# Altium PCB ESP32 with USBC PCB V1I1.PcbDoc (part 3 of 3)
Units mil, origin at the board's own origin, x right, y up, seen from the top; angles counter-clockwise.
Board outline 2713 x 1000 mil, 4 copper layers (L1, L2, L3, L4), stack 61.583 mil thick; 64 components, 73 nets, 299 pads, 159 vias.
Unrouted connection lines stored in the file: 1.
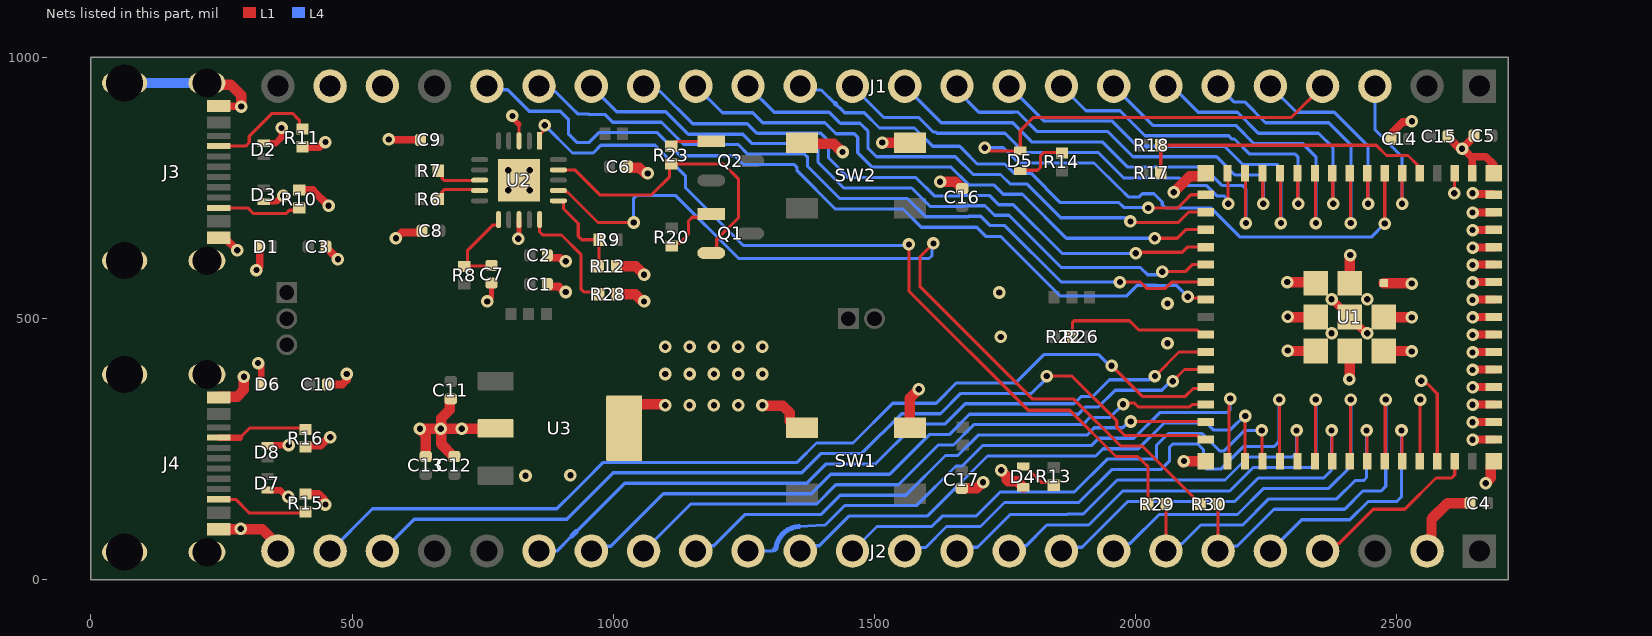
[diagram p4: the nets of this part, all layers, seen from the top]

## Via types
v1: diameter 24, hole 12, L1 to L4, tented both sides, 159 vias

## Nets (pads, with @x,y where several pads share a name; then routed paths per layer and width w, separated by ;. In a path a pad name is that pad's centre, name@x,y a point inside that pad or via, vN(x,y) a via of type N, cw(c..) or ccw(c..) an arc to the next point about the centre after c; other vN are vias at no path point) (continued)
ESP_USB_P: R22.2 R26.2 U1.24 | length 295.5
  L1 w6.03: R26.2@1878.99,465 1878.99,492.47 1882.52,496 1988.38,496 2006.13,478.25 2118.18,478.25 2121.72,474.72 2121.72,474.39 2126.57,469.54 U1.24@2134.45,469.54
FTDI_RESET: C7.2 R8.2 U2.11 | length 175.1
  L1 w6: C7.2@767,601.93 766.04,600.97 720.64,600.97 715.96,600.97 R8.2@715,600.01 720.64,605.64 720.64,630.01 762.63,672 770.2,679.57 779.99,679.57 780.22,679.79 U2.11@780.22,689.59
FTDI_USB_N: R6.2 U2.9 | length 78.5
  L1 w6.03: R6.2@665.01,729 672.62,736.61 672.62,743.46 676.16,746.99 729.79,746.99 730.79,745.99 U2.9@731.59,745.99
FTDI_USB_P: R7.2 U2.8 | length 91.4
  L1 w6.03: R7.2@665.01,783 672.62,775.39 672.62,767.99 676.16,764.46 743.63,764.46 U2.8@744.17,765
GND: C1.1 C2.1 C3.1 C4.1 C5.1 C6.1 C7.1 C8.1 C9.1 C10.1 C11.1 C12.1 C13.1 C14.1 C15.1 C16.1 C17.1 D1.1 D2.1 D3.1 D4.2 D6.1 D7.1 D8.1 J1.22 J1.23 J2.2 J2.24 J3.A1B12 J3.B1A12 J3.S1 J3.S2 J3.S3 J3.S4 J4.A1B12 J4.B1A12 J4.S1 J4.S2 J4.S3 J4.S4 R10.1 R11.1 R12.1 R15.1 R16.1 R28.2 SW1.3 SW1.4 SW2.3 SW2.4 U1.1 U1.2 U1.42 U1.43 U1.46 U1.47 U1.48 U1.49 U1.50 U1.51 U1.52 U1.53 U1.54 U1.55 U1.56 U1.57 U1.58 U1.59 U1.60 U1.61 U1.62 U1.63 U1.64 U1.65 U1.66 U1.67 U1.68 U1.69 U1.70 U1.71 U1.72 U1.73 U2.3 U2.13 U2.21 U3.2 U3.4 | length 4547.6
  L1 w6: U2.3@819.35,851.94 819.35,871.86 ; U1.42@2544.45,229.71 2544.45,344.45 v1(2545,345) ; v1(2547,381) 2550.79,381 2556.94,374.85 2559.03,374.85 2577.36,356.51 U1.43@2577.36,227.41 ; v1(2610,740) 2610.41,740.41 2610.41,778.18 U1.2@2610.83,778.59
  L1 w10.01: v1(759,533) 767,541 C7.1@767,568.07 ; v1(807,888) 807,884.21 819.35,871.86 ; v1@819.59,653 U2.13@819.59,689.59
  L1 w12: v1(320,415) 326.2,408.8 D6.1@326.2,374 ; D3.1@331,724.2 355.43,724.2 366.22,735 v1(368,735) ; D2.1@331,835.8 353.8,835.8 364.79,846.79 364.79,864.79 v1(365,865) ; D7.1@337,172 337.69,171.31 362.44,171.31 374.75,159 v1(378,159) ; D8.1@338.69,255.91 340.18,257.4 378.4,257.4 v1(379,258)
  L1 w15: J3.B1A12@244.84,655.02 255.67,655.02 v1(280,630.68) ; J3.A1B12@244.84,906.98 245.33,906.49 v1@287.51,906.49 ; v1(317,593) 323.2,599.2 D1.1@323.2,638 ; R10.1@399,746.01 424.99,746.01 v1(455,716) ; R11.1@405.22,828 436.56,828 446.56,838 v1(449,838) ; R15.1@411,164.01 411.45,164.46 435.71,164.46 447.28,152.9 447.28,145.72 v1(449,144) ; R16.1@411,253.99 414.13,257.12 439.69,257.12 455.56,273 v1(458,273) ; C3.1@449.93,638 449.93,636.82 v1(473,613.75) ; C10.1@452.93,374 481.21,374 490,382.79 v1(490,394) ; v1(570,843) 570.5,842.5 629.57,842.5 C9.1@630.07,843 ; v1(584,654) 595,665 631.07,665 C8.1@634.07,668 ; C1.1@873.93,566 873.93,564.82 877.06,561.69 895.88,561.69 906.56,551 v1(909,551) ; C2.1@873.93,621 873.93,619.82 877.06,616.69 897.88,616.69 904.56,610 v1@907,610 ; v1(2375,537.24) 2375.8,537.24 U1.61@2410.04,503 2439.08,473.96 2441.73,473.96 v1(2443.45,472.24) ; C14.1@2489.07,844 2492.2,847.13 2492.2,857.16 2511.32,876.28 2527.28,876.28 v1(2529,878) ; C15.1@2597.93,849 2601.06,845.87 2601.06,844.69 2619.03,826.72 2623.28,826.72 v1(2625,825) ; U1.1@2644.29,778.59 2644.29,808.14 2642.44,810 ; v1@2645,268.75 U1.46@2685.63,268.75 ; v1@2645,302.21 U1.47@2685.63,302.21 ; v1@2645,335.73 U1.48@2687.44,335.73 ; v1@2645,369.14 U1.49@2685.63,369.14 ; v1@2645,402.61 U1.50@2685.63,402.61 ; v1@2645,436.07 U1.51@2685.63,436.07 ; v1@2645,469.54 U1.52@2685.63,469.54 ; v1@2645,503 U1.53@2685.63,503 ; v1@2645,536.52 U1.54@2687.44,536.52 ; v1@2645,569.93 U1.55@2685.63,569.93 ; v1@2645,603.39 U1.56@2685.63,603.39 ; v1(2645,636.11) 2645.37,636.48 2685.26,636.48 U1.57@2685.63,636.86 ; v1(2645,669.57) 2645.37,669.95 2685.26,669.95 U1.58@2685.63,670.32 ; v1(2645,703.04) 2645.37,703.41 2685.26,703.41 U1.59@2685.63,703.79 ; v1(2645,740) 2646.37,738.63 2684.26,738.63 U1.60@2685.63,737.25 ; C5.1@2648.07,850 2648.07,848.82 2625,825.75 v1(2625,825) ; U1.62@2685.63,778.59 2685,779.22 2685,795 2670,810 2642.44,810 ; v1(2625,825) 2627.44,825 2642.44,810
  L1 w20: J3.S1@222.2,951.08 225.91,947.37 267.63,947.37 287.48,927.52 287.48,906.52 v1(288,906) ; J4.B1A12@244.84,97.02 286.02,97.02 v1(287,98) 287.77,97.23 327.67,97.23 358,66.91 J2.24@358,55 ; J4.A1B12@244.84,348.98 246.65,350.8 279.8,350.8 293,364 v1(293,389) ; C13.1@641,235.93 641,276.92 630,287.92 v1(630,289) v1(670,289) ; C11.1@689,346.07 687.82,346.07 687.19,345.44 687.19,325.71 670.77,309.28 670.77,289.77 v1(670,289) ; C12.1@696,235.93 694.82,235.93 670.77,259.98 670.77,288.23 v1(670,289) ; U3.2@774.97,290 774.47,289.5 710.5,289.5 v1(710,289) v1(670,289) ; R12.1@1006.01,600 1043,600 v1(1059,584) ; R28.2@1007.01,547 1042.44,547 1056,533.44 v1@1056,533 ; U3.4@1021.03,290 1021.03,309.55 U3.4@1045.48,334 ; C6.1@1026.93,791 1026.93,789.82 1027.56,789.19 1049.81,789.19 v1@1061,778 ; U3.4@1045.48,336 v1@1098,336 ; v1(1285.67,334) 1286.43,333.23 1324.77,333.23 1338.3,319.7 1338.3,303.18 1350.48,290.99 SW1.4@1361.31,290.99 ; SW2.4@1361.31,837 1363.21,835.1 1421.82,835.1 1437.92,819 v1(1439,819) ; v1@1514,838 v1(1515,837) SW2.3@1568,837 ; SW1.3@1568,290.99 1568,348 v1(1585,365) ; v1(1625.7,762) 1654.47,762 1666.19,750.28 1666.19,749.56 1666.82,748.93 C16.1@1668,748.93 ; C17.1@1667,175.07 1667.63,175.7 1695.62,175.7 1706.92,187 v1(1708,187) ; v1(1743,210) 1743,208.92 1753.24,198.68 1753.24,191.48 ; 1755.72,189 1773.24,189 D4.2@1785.24,177 ; v1(2073,742) 2103.84,772.84 2128.7,772.84 U1.63@2134.45,778.59 ; v1@2090,225 v1(2092.41,227.41) U1.64@2134.45,227.41 ; v1(2290,570) U1.71@2326.98,570 ; v1(2291.27,503.77) 2292.36,503.77 2293.12,503 U1.72@2345.08,503 ; v1@2292.04,438.04 U1.73@2345.08,438.04 ; v1@2410.04,385 U1.70@2410.04,438.04 ; U1.69@2410.04,567.96 v1@2410.04,621 ; U1.68@2475,438.04 v1@2528.04,438.04 ; U1.67@2475,503 v1@2528.04,503 ; U1.66@2475,567.96 v1@2528.04,567.96 ; J2.2@2558,55 2566.42,63.42 2566.42,116.42 2597,147 C4.1@2640.07,147 ; v1(2670,185) 2679.88,194.88 2679.88,221.66 U1.65@2685.63,227.41
  L4 w20: J3.S3@64.72,951.08 65.8,950 66.88,951.08 J3.S1@222.2,951.08
  other v1: 832,199 918,200 2645,268 2645,301.46 1099.67,334 1146.17,334 1192.67,334 1239.17,334 2645,334.98 2645,368.39 2409.27,384.23 1099.67,394 1146.17,394 1192.67,394 1239.17,394 1285.67,394 2645,401.86 2645,435.32 2528.8,437.27 2291.27,438.8 1099.67,446 1146.17,446 1192.67,446 1239.17,446 1285.67,446 2061,453 1742,465 2645,468.79 2375,472.24 2528.8,502.23 2645,502.25 2061,529 1059,533 2645,535.77 2443.45,537.24 1739,550 2528.8,567.2 2645,569.18 2645,602.65 909,610 2410.8,621.77 818,653 799,746 840,746 1066,778 799,784 840,784
GPIO0: R17.2 R18.2 U1.4 | length 577.7
  L1 w6: R17.2@2048.01,779 R18.2@2048.01,832 2460.72,832 2480.3,812.42 2521.44,812.42 2541.02,792.84 2541.02,781.46 U1.4@2543.9,778.59
GPIO1: J1.3 U1.5 | length 305.3
  L1 w6: v1(2510,720) 2510.22,720.22 2510.22,778.37 U1.5@2510.43,778.59
  L4 w6: J1.3@2458,945 2458,862 2510,810 v1(2510,720)
GPIO2: D5.2 J1.4 U1.6 | length 1672.8
  L1 w6: v1(1711,827) 1714.79,827 1720.79,821 1778.5,821 D5.2@1779,821.5 1779,860 1804,885 2298,885 J1.4@2358,945 ; v1(2477,682) U1.6@2476.98,775.69
  L4 w6: v1(1711,827) 1747,827 1776,798 1920.43,798 1968.43,750 1969,750 1986,733 2006.82,733 2012.82,739 2035.18,739 2051,723.18 2051,717.86 2056.86,712 2144.03,712 2200.03,656 2451,656 v1(2477,682)
GPIO3: J1.5 U1.7 | length 403.8
  L1 w6: U1.7@2443.5,778.59 2444.25,777.84 2444.25,720.75 v1(2445,720)
  L4 w6: J1.5@2258,945 2308,895 2380,895 2445,830 v1(2445,720)
GPIO4: J1.6 U1.8 | length 546.8
  L1 w6: U1.8@2410.04,778.59 2411.02,777.61 2411.02,683.98 v1(2412,683)
  L4 w6: J1.6@2158,945 2188,915 2208.57,915 2248.57,875 2370,875 2412,833 v1(2412,683)
GPIO5: J1.7 U1.9 | length 533
  L1 w6: v1@2377.32,720.75 U1.9@2377.32,777.84
  L4 w6: J1.7@2058,945 2070,945 2120,895 2195,895 2235,855 2350,855 2378.07,826.93 v1(2378.07,720)
GPIO6: J1.8 U1.10 | length 665.6
  L1 w6: U1.10@2343.48,778 2344.09,777.4 2344.09,683.98 v1(2345.07,683)
  L4 w6: J1.8@1958,945 2033,870 2191.72,870 2226.72,835 2320,835 2345.07,809.93 v1(2345.07,683)
GPIO7: J1.9 U1.11 | length 655.7
  L1 w6: v1@2310.39,720.75 U1.11@2310.39,777.84
  L4 w6: J1.9@1858,945 1905,898 1970,898 2018,850 2178.28,850 2184.28,844 2189.36,844 2218.36,815 2305.28,815 2311.14,809.14 v1(2311.14,720)
GPIO8: J1.10 U1.12 | length 785.8
  L1 w6: U1.12@2276.56,778 2277.16,777.4 2277.16,683.98 v1(2278.14,683)
  L4 w6: J1.10@1758,945 1825,878 1955.28,878 2003.28,830 2170,830 2205,795 2271.07,795 2278.14,787.93 v1(2278.14,683)
GPIO9: J1.11 U1.13 | length 770.4
  L1 w6: v1@2243.46,720.75 U1.13@2243.46,777.84
  L4 w6: J1.11@1658,945 1658,937 1700,895 1765.7,895 1766.21,895.51 1774.49,895.51 1812,858 1947,858 1995,810 2155,810 2190,775 2238.35,775 2244.21,769.14 v1(2244.21,720)
GPIO10: J1.12 U1.14 | length 895.4
  L1 w6: U1.14@2209.63,778 2210.23,777.4 2210.23,683.98 v1(2211.21,683)
  L4 w6: J1.12@1558,945 1628,875 1765,875 1802,838 1937,838 1985,790 2130,790 2165,755 2204.14,755 2211.21,747.93 v1(2211.21,683)
GPIO11: J1.13 U1.15 | length 873.6
  L1 w6: v1@2176.54,720.75 U1.15@2176.54,777.84
  L4 w6: J1.13@1458,945 1518,885 1585,885 1613,857 1617.72,857 1619.72,855 1750,855 1787,818 1928.72,818 1977.72,769 2084.18,769 2098.18,755 2135,755 2155,735 2169.14,735 2175,729.14 2175,722.28 v1(2177.28,720)
GPIO12: J1.14 U1.16 | length 883.4
  L1 w6: v1(2024,712) 2081.18,712 2100,730.82 2100,731.39 2105.86,737.25 U1.16@2134.45,737.25
  L4 w6: J1.14@1358,945 1365.23,937.77 1398.03,937.77 1425.23,911.31 ; 1425.29,911.25 1440.18,896.82 1443.08,894 1447.14,894 1480.72,894 1509.72,865 1576.72,865 1611.72,830 1663.14,830 1669,824.14 1697.14,796 1749.72,796 1767.72,778 1800,778 1856,722 1968.15,722 1977.15,713 2023,713 v1(2024,712)
  L4 w10: 1425.23,911.31 ccw(c1458,945) 1425.29,911.25
GPIO13: J1.15 U1.17 | length 1011.7
  L1 w6: v1(1990,686) 1992,684 2081.47,684 2101.26,703.79 U1.17@2134.45,703.79
  L4 w6: J1.15@1258,945 1308,895 1413.31,895 1417.04,891.39 1429.06,879.74 1434.8,874 1472.43,874 1488,858.43 1488,825.82 1503.82,810 1654.86,810 1688.86,776 1741.43,776 1759.43,758 1791.72,758 1856.72,693 1979.21,693 1986.21,686 v1(1990,686)
GPIO14: J1.16 U1.18 | length 1120.9
  L1 w6: v1(2036.59,654) 2079.75,654 2096.07,670.32 U1.18@2134.45,670.32
  L4 w6: J1.16@1158,945 1209,894 1267,894 1286,875 1405.22,875 1415.03,865.48 1426.52,854 1461,854 1468,847 1468,817.53 1495.53,790 1646.57,790 1680.57,756 1728.28,756 1746.28,738 1783.43,738 1867.43,654 v1(2036.59,654)
GPIO15: J1.17 U1.19 | length 1233.5
  L1 w6: v1(2000,625) 2002,627 2089,627 2098.86,636.86 U1.19@2134.45,636.86
  L4 w6: J1.17@1058,945 1068.33,934.67 1090.33,934.67 1152,873 1256.28,873 1273.65,855.63 1276.02,855 1397.11,855 1401,851.23 1409.07,843.16 1412,840.23 1412,807.82 1449.82,770 1579.51,770 1614.51,735 1663.01,735 1664.01,736 1720,736 1738,718 1766,718 1859,625 v1(2000,625)
GPIO16: J1.18 U1.20 | length 1352.2
  L1 w6: v1(2050.71,590) 2095,590 2108.39,603.39 U1.20@2134.45,603.39
  L4 w6: J1.18@958,945 1007,896 1100.72,896 1143.72,853 1248,853 1266,835 1386.14,835 1392,829.14 1392,799.53 1441.53,750 1571.23,750 1606.23,715 1671.29,715 1672.29,716 1711.72,716 1729.72,698 1757.72,698 1857.72,598 2009.18,598 2023.18,584 2040.92,584 2046.92,590 v1(2050.71,590)
GPIO17: J1.19 U1.21 | length 1453
  L1 w6: v1(1970,570) 2009.34,570 2021.34,558 2056.89,558 2068.82,569.93 U1.21@2134.45,569.93
  L4 w6: J1.19@858,945 868.33,934.67 889.33,934.67 920.07,903.93 923,901 932,892 952.18,892 953.18,891 983.72,891 998.72,876 1092.43,876 1095.36,873.07 1135.43,833 1239.72,833 1257.72,815 1366.14,815 1372,809.14 1372,791.25 1433.25,730 1562.94,730 1597.94,695 1679.57,695 1680.57,696 1703.43,696 1721.43,678 1749.43,678 1857.43,570 v1(1970,570)
GPIO18: J1.20 U1.22 | length 1599.6
  L1 w6: v1(2100,542) 2102.68,539.32 2131.59,539.32 U1.22@2134.45,536.46
  L4 w6: J1.20@758,945 764.73,938.27 797.73,938.27 839,897 898.72,897 914,881.72 914,853.82 930.82,837 953.18,837 972.18,856 1084.15,856 1128.43,811.72 1132.57,811.72 1232.72,811.72 1249.43,795 1346.14,795 1352,789.14 1352,782.96 1424.96,710 1554.66,710 1589.66,675 1687.86,675 1696.14,675 1714.15,657 1742.15,657 1856.15,543 1982.18,543 2003.18,564 2038.53,564 2039.53,563 2061.89,563 2062.89,564 2078,564 v1(2100,542)
GPIO21: J2.19 U1.25 | length 1434.3
  L1 w6: v1(2037,390) 2083.07,436.07 U1.25@2134.45,436.07
  L4 w6: J2.19@858,55 892,55 921.06,84.06 ; 928.94,91.94 1021.85,184.85 1370.72,184.85 1407.87,222 1502,222 1578,298 1634.72,298 1673.71,337 1882.01,337 1896.01,351 1918,351 1950,383 2026.21,383 2033.21,390 v1(2037,390)
  L4 w10: 921.06,84.06 cw(c958,55) 928.94,91.94
GPIO26: J2.18 U1.26 | length 1320.4
  L1 w6: v1(2071,380) 2093.61,402.61 U1.26@2134.45,402.61
  L4 w6: J2.18@958,55 967.23,64.23 995.23,64.23 1095.85,164.85 1379,164.85 1416.15,202 1529,202 1605,278 1643,278 1682,317 1890.29,317 1904.29,331 1929,331 1961,363 2050.21,363 2067.21,380 v1(2071,380)
GPIO33: J2.17 U1.28 | length 1199
  L1 w6: v1(1976,336) 1979.79,336 1982.55,338.77 1996.95,338.77 2004.55,331.16 2103.61,331.16 2108.12,335.68 U1.28@2134.45,335.68
  L4 w6: J2.17@1058,55 1147.85,144.85 1389,144.85 1426.15,182 1546,182 1622,258 1651.28,258 1690.28,297 1898.58,297 1912.58,311 1951,311 v1(1976,336)
GPIO34: J2.16 U1.29 | length 1079.6
  L1 w6: v1(1990.89,303.11) 2133.56,303.11 U1.29@2134.45,302.21
  L4 w6: J2.16@1158,55 1168.33,65.33 1192.33,65.33 1251.85,124.85 1397.28,124.85 1434.43,162 1560,162 1636,238 1659.57,238 1698.57,277 1906.86,277 1920.86,291 1975,291 1987.11,303.11 v1(1990.89,303.11)
GPIO35: J2.15 U1.31 | length 1181.1
  L1 w6: U1.31@2175.04,228.16 2178.39,231.51 2178.39,344.39 v1(2181,347)
  L4 w6: J2.15@1258,55 1306.03,55 1308.95,57.93 1311.3,60.27 ; 1355.27,101.92 1405.57,104.85 1442.72,142 1580,142 1656,218 1667.85,218 1706.85,257 1915.15,257 1929.15,271 1997,271 2046.01,320 2175.14,320 2181,325.86 v1(2181,347)
  L4 w10: 1311.3,60.27 cw(c1358,55) 1355.27,101.92
GPIO36: J2.14 U1.32 | length 1054.4
  L1 w6: U1.32@2209.63,228.74 v1(2209.63,313.63)
  L4 w6: J2.14@1358,55 1368.23,65.23 1394.23,65.23 1451,122 1601.43,122 1716.43,237 1923.43,237 1937.43,251 2005.29,251 2054.29,300 2135.57,300 2148.57,287 2181.43,287 2208.06,313.63 v1(2209.63,313.63)
GPIO37: J2.13 U1.33 | length 982.6
  L1 w6: U1.33@2241.97,228.16 v1@2241.97,285.25
  L4 w6: J2.13@1458,55 1505,102 1609.72,102 1629.72,122 1648,122 1648.11,122.11 1694.89,122.11 1740.78,168 1882.72,168 1945.72,231 2039.72,231 2039.72,257.14 2062.57,280 2127.28,280 2160.5,246.78 2169.5,246.78 2208.72,286 v1(2241.22,286) v1@2241.22,282.21
GPIO38: J2.12 U1.34 | length 1074.7
  L1 w6: v1(2275,345) 2275.59,344.41 2275.59,228 U1.34@2275.7,227.89
  L4 w6: J2.12@1558,55 1564.73,61.73 1597.73,61.73 1638,102 1703.06,102 1749.06,148 1891,148 1954,211 2048,211 2065,228 2065,254.14 2070.86,260 2119,260 2130,249 2130,217.86 2135.86,212 2163,212 2206,255 2265,255 2275,265 v1(2275,345)
GPIO39: J2.11 U1.35 | length 828
  L1 w6: U1.35@2308.9,228.16 v1@2308.9,285.25
  L4 w6: J2.11@1658,55 1665.23,62.23 1697.23,62.23 1760,125 1869,125 1870,126 1900,126 1965,191 2171,191 2215,235 2300,235 2308.15,243.15 v1(2308.15,286)
GPIO40: J2.10 U1.36 | length 895.5
  L1 w6: U1.36@2342.63,227.89 2344.06,229.31 2344.06,344.06 v1(2345,345)
  L4 w6: J2.10@1758,55 1768.33,65.33 1790.33,65.33 1830,105 1910,105 1975,170 2180,170 2225,215 2335,215 2345,225 v1(2345,345)
GPIO41: J2.9 U1.37 | length 714.3
  L1 w6: U1.37@2375.83,228.16 v1@2375.83,285.25
  L4 w6: J2.9@1858,55 1865.23,62.23 1897.23,62.23 1985,150 2190,150 2235,195 2360,195 2375.08,210.08 v1(2375.08,286)
GPIO42: J2.8 U1.38 | length 763.8
  L1 w6: U1.38@2410.98,229.31 v1@2410.98,344.06
  L4 w6: J2.8@1958,55 1972.61,55 1987.35,69.73 1989.73,69.73 2045,125 2195,125 2245,175 2370,175 2411.93,216.93 v1(2411.93,345)
GPIO45: J2.5 U1.41 | length 478.1
  L1 w6: U1.41@2509.69,228.16 v1@2509.69,285.25
  L4 w6: J2.5@2258,55 2318,115 2410,115 2445,150 2500,150 2508.94,158.94 v1(2508.94,286)
GPIO46: J2.4 U1.44 | length 339.8
  L1 w6: J2.4@2358,55 2372.61,55 2387.35,69.73 2389.73,69.73 2455,135 2515,135 2575,195 2604.97,195 2610.83,200.86 U1.44@2610.83,227.41
GPIO47: J2.23 U1.27 | length 1872.8
  L1 w6: v1(1954,410) 2012.84,351.16 2095.32,351.16 2110.43,366.27 2131.57,366.27 U1.27@2134.45,369.14
  L4 w6: J2.23@458,55 539,136 892,136 929,173 929.18,173 945,188.82 945,189 980.85,224.85 1352,224.85 1389.15,262 1459,262 1535,338 1618.15,338 1657.15,377 1770.43,377 1824.43,431 1929.21,431 1950.21,410 v1(1954,410)
GPIO48: J2.22 U1.30 | length 1774.9
  L1 w6: v1(1830,390) 1878.21,390 1963.89,304.32 1963.89,291.92 1979.71,276.11 2002.08,276.11 2119.22,276.11 2126.57,268.75 U1.30@2134.45,268.75
  L4 w6: J2.22@558,55 619,116 911,116 999.85,204.85 1361,204.85 1398.15,242 1476,242 1552,318 1626.43,318 1665.43,357 1800.79,357 1830,386.21 v1(1830,390)
NetD4_1: D4.1 R13.1 | length 72.7
  L1 w6: D4.1@1785.24,217 1789.24,217 1819.62,186.61 1837.37,186.61 R13.1@1843,180.98
NetD5_1: D5.1 R14.1 | length 108.2
  L1 w6: D5.1@1779,782.5 1780.5,784 1812.14,784 1818,789.86 1818,812.14 1823.86,818 1858.01,818 R14.1@1859,817.01
NetJ3_A5: J3.A5 R11.2 | length 212.8
  L1 w6: J3.A5@244.84,830.21 277,830.21 296.16,830.21 303.19,837.24 303.19,849.31 346.88,893 385.97,893 399.19,879.78 399.19,867.64 403.82,863.01 R11.2@405,863.01
NetJ3_B5: J3.B5 R10.2 | length 161.9
  L1 w6: J3.B5@244.84,712.1 300.07,712.1 310.85,701.31 373.91,701.31 379.96,707.36 393.19,707.36 R10.2@397.82,711.99
NetJ4_A5: J4.A5 R16.2 | length 174.9
  L1 w6: 285.48,272.21 303.95,290.69 R16.2@408.32,290.69
  L1 w12: J4.A5@244.84,272.21 285.48,272.21 ; R16.2@408.32,290.69 R16.2@411,288.01
NetJ4_B5: J4.B5 R15.2 | length 177.8
  L1 w6: J4.B5@244.84,154.1 277,154.1 303.1,128 409.01,128 R15.2@411,129.99
NetQ1_1: Q1.1 R20.1 | length 116
  L1 w6: R20.1@1112,638.99 1117.63,644.62 1127.27,644.62 1144,661.35 1144,687 1151.14,694.14 1181.31,694.14 Q1.1@1187.58,700.4
NetQ2_1: Q2.1 R23.1 | length 80.5
  L1 w6: R23.1@1111,830.01 1112.18,830.01 1121.57,839.4 Q2.1@1187.58,839.4
NetR28_1: R28.1 U2.15 | length 225.7
  L1 w6: U2.15@858.96,689.59 858.96,665.86 864.81,660 901,660 938,623 938,556.86 943.86,551 968.99,551 R28.1@972.99,547
RTS_FTDI: Q1.2 R23.2 U2.19 | length 579.5
  L1 w6: U2.19@895,784.68 920,784.68 926.58,784.68 974.26,737 1073.14,737 1108,771.86 1108,792.99 R23.2@1111,795.99 1211.01,795.99 1240,767 1240,693.63 1198.23,651.86 1198.23,631.38 1192.44,625.6 Q1.2@1187.58,625.6
RXD_FTDI: R29.2 U2.1 | length 1586.5
  L1 w6: U2.1@859.18,851.94 v1@866.32,859.08 ; v1(1566,642) 1566,553 1794.3,324.7 1873.86,324.7 1962.45,236.11 2003.89,236.11 2015,225 2023.81,216.19 2023.81,207.19 2023.99,207.01 R29.2@2023.99,145
  L4 w6: v1(869,870) 922,817 961.47,817 976.33,831.86 1080.01,831.86 1138,773.86 1138,751 1249,640 1564,640 v1(1566,642)
TXD_FTDI: R30.2 U2.17 | length 1653.1
  L1 w6: U2.17@910.12,742.88 911.6,741.4 913.29,741.4 970.69,684 v1(1039,684) ; v1(1613,644) 1587,618 1587,562 1803,346 1881.53,346 1971.43,256.11 2012.89,256.11 2117.18,151.81 2118.36,151.81 2123.99,146.18 R30.2@2123.99,145
  L4 w6: v1(1039,684) 1039,730.14 1044.86,736 1119,736 1240,615 1604.46,615 1610.32,620.86 1610.32,641.32 v1(1613,644)
UORXD: J2.6 R30.1 U1.40 | length 743
  L1 w6: J2.6@2158,55 R30.1@2158.01,145 ; U1.40@2477.91,229.31 v1@2477.91,344.06
  L4 w6: J2.6@2158,55 2167.73,64.73 2194.73,64.73 2265,135 2400,135 2435,170 2470,170 2478.86,178.86 v1(2478.86,345)
UOTXD: J2.7 R29.1 U1.39 | length 679.6
  L1 w6: J2.7@2058,55 R29.1@2058.01,145 ; U1.39@2442.76,228.16 v1@2442.76,285.25
  L4 w6: J2.7@2058,55 2072.61,55 2087.35,69.73 2089.73,69.73 2125,105 2205,105 2255,155 2385,155 2420,190 2436.15,190 2442.01,195.86 v1(2442.01,286)
VBUS_SENSE: R9.1 R12.2 U2.16 | length 183.4
  L1 w6: U2.16@895,725.63 904.79,725.63 905.02,725.4 905.02,709.98 920,695 933,682 933,658 940,651 R9.1@972.99,651 972.49,650.5 972.49,600.5 R12.2@971.99,600
pads on no net: J1.24 J3.A8 J3.B8 J4.A8 J4.B8 U2.2 U2.4 U2.5 U2.6 U2.7 U2.14

## Polygon pours and split planes (outlines as drawn)
+3V3_FTDI on L1 "NONET_L01_P-001" (solid, pour order 14): 960,780 975,795 975,815 980,815 1000,835 1000,875 1030,875 1035,880 1035,820 1030,820 1010,800 1010,765 1005,760 975,760 975,765
GND on L1 "GND_L01_P010" (solid, pour order 10): 1017,166 1307,166 1320,179 1320,482 1080,482 1049,451 1048,451 1005,408 1005,406 913,314 909,318 739,318 739,324 706,357 660,357 652,349 652,323 641,312 618,312 609,303 609,270 615,264 618,264 618,225 803,225 832,254 904,254 934,224 960,224 1017,167
GND on L1 "GND_L01_P009" (solid, pour order 9): 2261,641 2263,643 2544,643 2544,412 2508,376 2284,376 2245,415 2245,610 2263,628 2263,644
+VCC_FTDI on L1 "+VCC_FTDI_L01_P008" (solid, pour order 8): 856,635 856,484 858,482 824,482 821,485 822,486 822,611 798,635
+5V_VBUS2 on L1 "+5V_VBUS2_L01_P007" (solid, pour order 7): 435,355 436,354 436,412 406,442 406,464 399,471 354,471 339,456 339,355
+5V_VBUS1 on L1 "+5V_VBUS1_L01_P006" (solid, pour order 6): 340,659 338,661 431,661 431,533 424,526 340,526 340,528
+5V on L1 "+5V_L01_P005" (solid, pour order 5): 356.49,526.99 517,523.02 517,519 591,445 670,445 670,443 703,410 704,411 818,411 832,397 832,356 721,356 713,364 712,363 673,363 628,408 537,408 466,479 346.36,479 343,500
+3V3_REG on L1 "+3V3_REG_L01_P004" (solid, pour order 4): 812,226 812,204 815,201 815,178 747,178 715,146 614,146 614,205 634,217 809,223
+3V3_FTDI on L1 "+3V3_FTDI_L01_P003" (solid, pour order 3): 648,673 648,565 665,565 683,547 730,547 739,556 737,558 737,580 703,580 696,587 696,588 682,602 683,603 683,654 688,659 701,659 720,678 718,680 718,735 710,735
+3V3 on L1 "+3V3_L01_P000" (solid, pour order 0): 2510,850 2510,836 2542,804 2552,804 2552,801 2554,799 2594,799 2582,819 2580,835 2580,865 2580,875 2595,873 2616,873 2623,885 2623,898 2616,903 2594,908 2587,901 2567,901 2551,885 2551,862 2547,858 2513,858 2510,858
FTDI_USB_N on L2 "NONET_L01_P-001" (solid, pour order 13): 12,15 2692,15 2699,22 2699,985 19,985 12,978 12,16
+3V3_REG on L2 "NONET_L01_P-001" (solid, pour order 12): 593,233 595,231 804,231 804,146 791,133 604,133 591,146 593,148 593,231
no net on L2 "NONET_L01_P-001" (solid, pour order 11): 2698,21 2699,22 2699,985 1015,985 912,882 912,807 1039,807 1040,808 1041,807 1263,807 1477,593 1477,440 1604,440 1737,573 1777,573 1777,590 1939,752 1922,769 1922,817 1926,813 2532,813 2532,674 2568,638 2568,161 2471,161 2408,98 2408,5 2680,5 2699,24
GND on L3 (split plane): 2712.95,0.05 0.05,0.05 0.05,999.95 2712.95,999.95

## Silkscreen, mask and mechanical layers (free items; w line width, h text height)
Top Overlay:
  lines w5: 755,884 755,898 ; 758,96 758,132 ; 1256,880 1256,904 ; 1260,96 1260,137 ; 1760,93 1760,129 ; 1760,870 1760,902 ; 2259,93 2259,145 ; 2262,863 2262,900
  text "NC" at 316,866 h40
  text "J1" at 2334,849 h40
  text "USER" at 1720,687 h40
  text "BOOT/USR" at 1318,626 h40
  text "USB1" at 438,542 h40
  text "UART" at 19,524 h40
  text "REG" at 1282,489 h40
  text "+3V3" at 1556,487 h40
  text "+5V" at 438,482 h40
  text "ESP" at 19,449 h40
  text "USB2" at 438,418 h40
  text "RESET" at 1375,342 h40
  text "POWER" at 1732,256 h40
  text "J2" at 2334,117 h40
Bottom Overlay:
  text "NC" at 380,877 h40 r90
  text "GND" at 480,877 h40 r90
  text "GND" at 580,877 h40 r90
  text "+5V" at 675,877 h40 r90
  text "IO18" at 780,877 h40 r90
  text "IO17" at 880,877 h40 r90
  text "IO16" at 980,877 h40 r90
  text "IO15" at 1080,877 h40 r90
  text "IO14" at 1175,877 h40 r90
  text "IO13" at 1280,877 h40 r90
  text "IO12" at 1380,877 h40 r90
  text "IO11" at 1480,877 h40 r90
  text "IO10" at 1580,877 h40 r90
  text "IO9" at 1675,877 h40 r90
  text "IO8" at 1775,877 h40 r90
  text "IO7" at 1875,877 h40 r90
  text "IO6" at 1975,877 h40 r90
  text "IO5" at 2075,877 h40 r90
  text "IO4" at 2170,877 h40 r90
  text "IO3" at 2280,877 h40 r90
  text "IO2" at 2380,877 h40 r90
  text "IO1" at 2480,877 h40 r90
  text "IO0" at 2580,877 h40 r90
  text "+3V3" at 2675,877 h40 r90
  text "<---PIN1--->" at 2664,699 h35 r90
  text "<C> SHAHBAZ AHMED SHAH" at 2289,641 h50
  text "www.linkedin.com/in/shahbazahmedshah" at 2454,521 h40
  text "V1I1 (JUNE 2025)" at 2089,446 h40
  text "GND" at 374,272.41 h40 r90
  text "IO47" at 474,272.41 h40 r90
  text "IO48" at 571.05,272.41 h40 r90
  text "USB-" at 674,272.41 h40 r90
  text "USB+" at 774,272.41 h40 r90
  text "IO21" at 874,272.41 h40 r90
  text "IO26" at 971.05,272.41 h40 r90
  text "IO33" at 1074,272.41 h40 r90
  text "IO34" at 1174,272.41 h40 r90
  text "IO35" at 1274,272.41 h40 r90
  text "IO36" at 1371.05,272.41 h40 r90
  text "IO37" at 1474,272.41 h40 r90
  text "IO38" at 1574,272.41 h40 r90
  text "IO39" at 1674,272.41 h40 r90
  text "IO40" at 1771.05,272.41 h40 r90
  text "IO41" at 1874,272.41 h40 r90
  text "IO42" at 1974,272.41 h40 r90
  text "TXD" at 2074,272.41 h40 r90
  text "RXD" at 2171.05,272.41 h40 r90
  text "IO45" at 2274,272.41 h40 r90
  text "IO46" at 2374,272.41 h40 r90
  text "EN" at 2474,272.41 h40 r90
  text "GND" at 2571.05,272.41 h40 r90
  text "+3V3" at 2674,272.41 h40 r90
Board Shape:
  lines w20: 8,8 8,988 10,990 2619,990 2703,990 2704,991 2704,9 2703,8 8,8

## Text inside footprints (layer, text, board x,y; h text height)
J1: Bottom Overlay "1" at 2641,1021 h40 r270
J2: Bottom Overlay "1" at 2634,-29 h40 r270